# Altium PCB PCB.PcbDoc (part 4 of 11)
Units mm, origin at the board's own origin, x right, y up, seen from the top; angles counter-clockwise.
Board outline 100.46 x 70.51 mm, 10 copper layers (L1(SIG), L2(GND), L3(PWR), L4(SIG), L5(GND), L6(SIG), L7(GND), L8(SIG), L9(GND), L10(SIG)), stack 1.49 mm thick; 425 components, 324 nets, 2004 pads, 1425 vias.
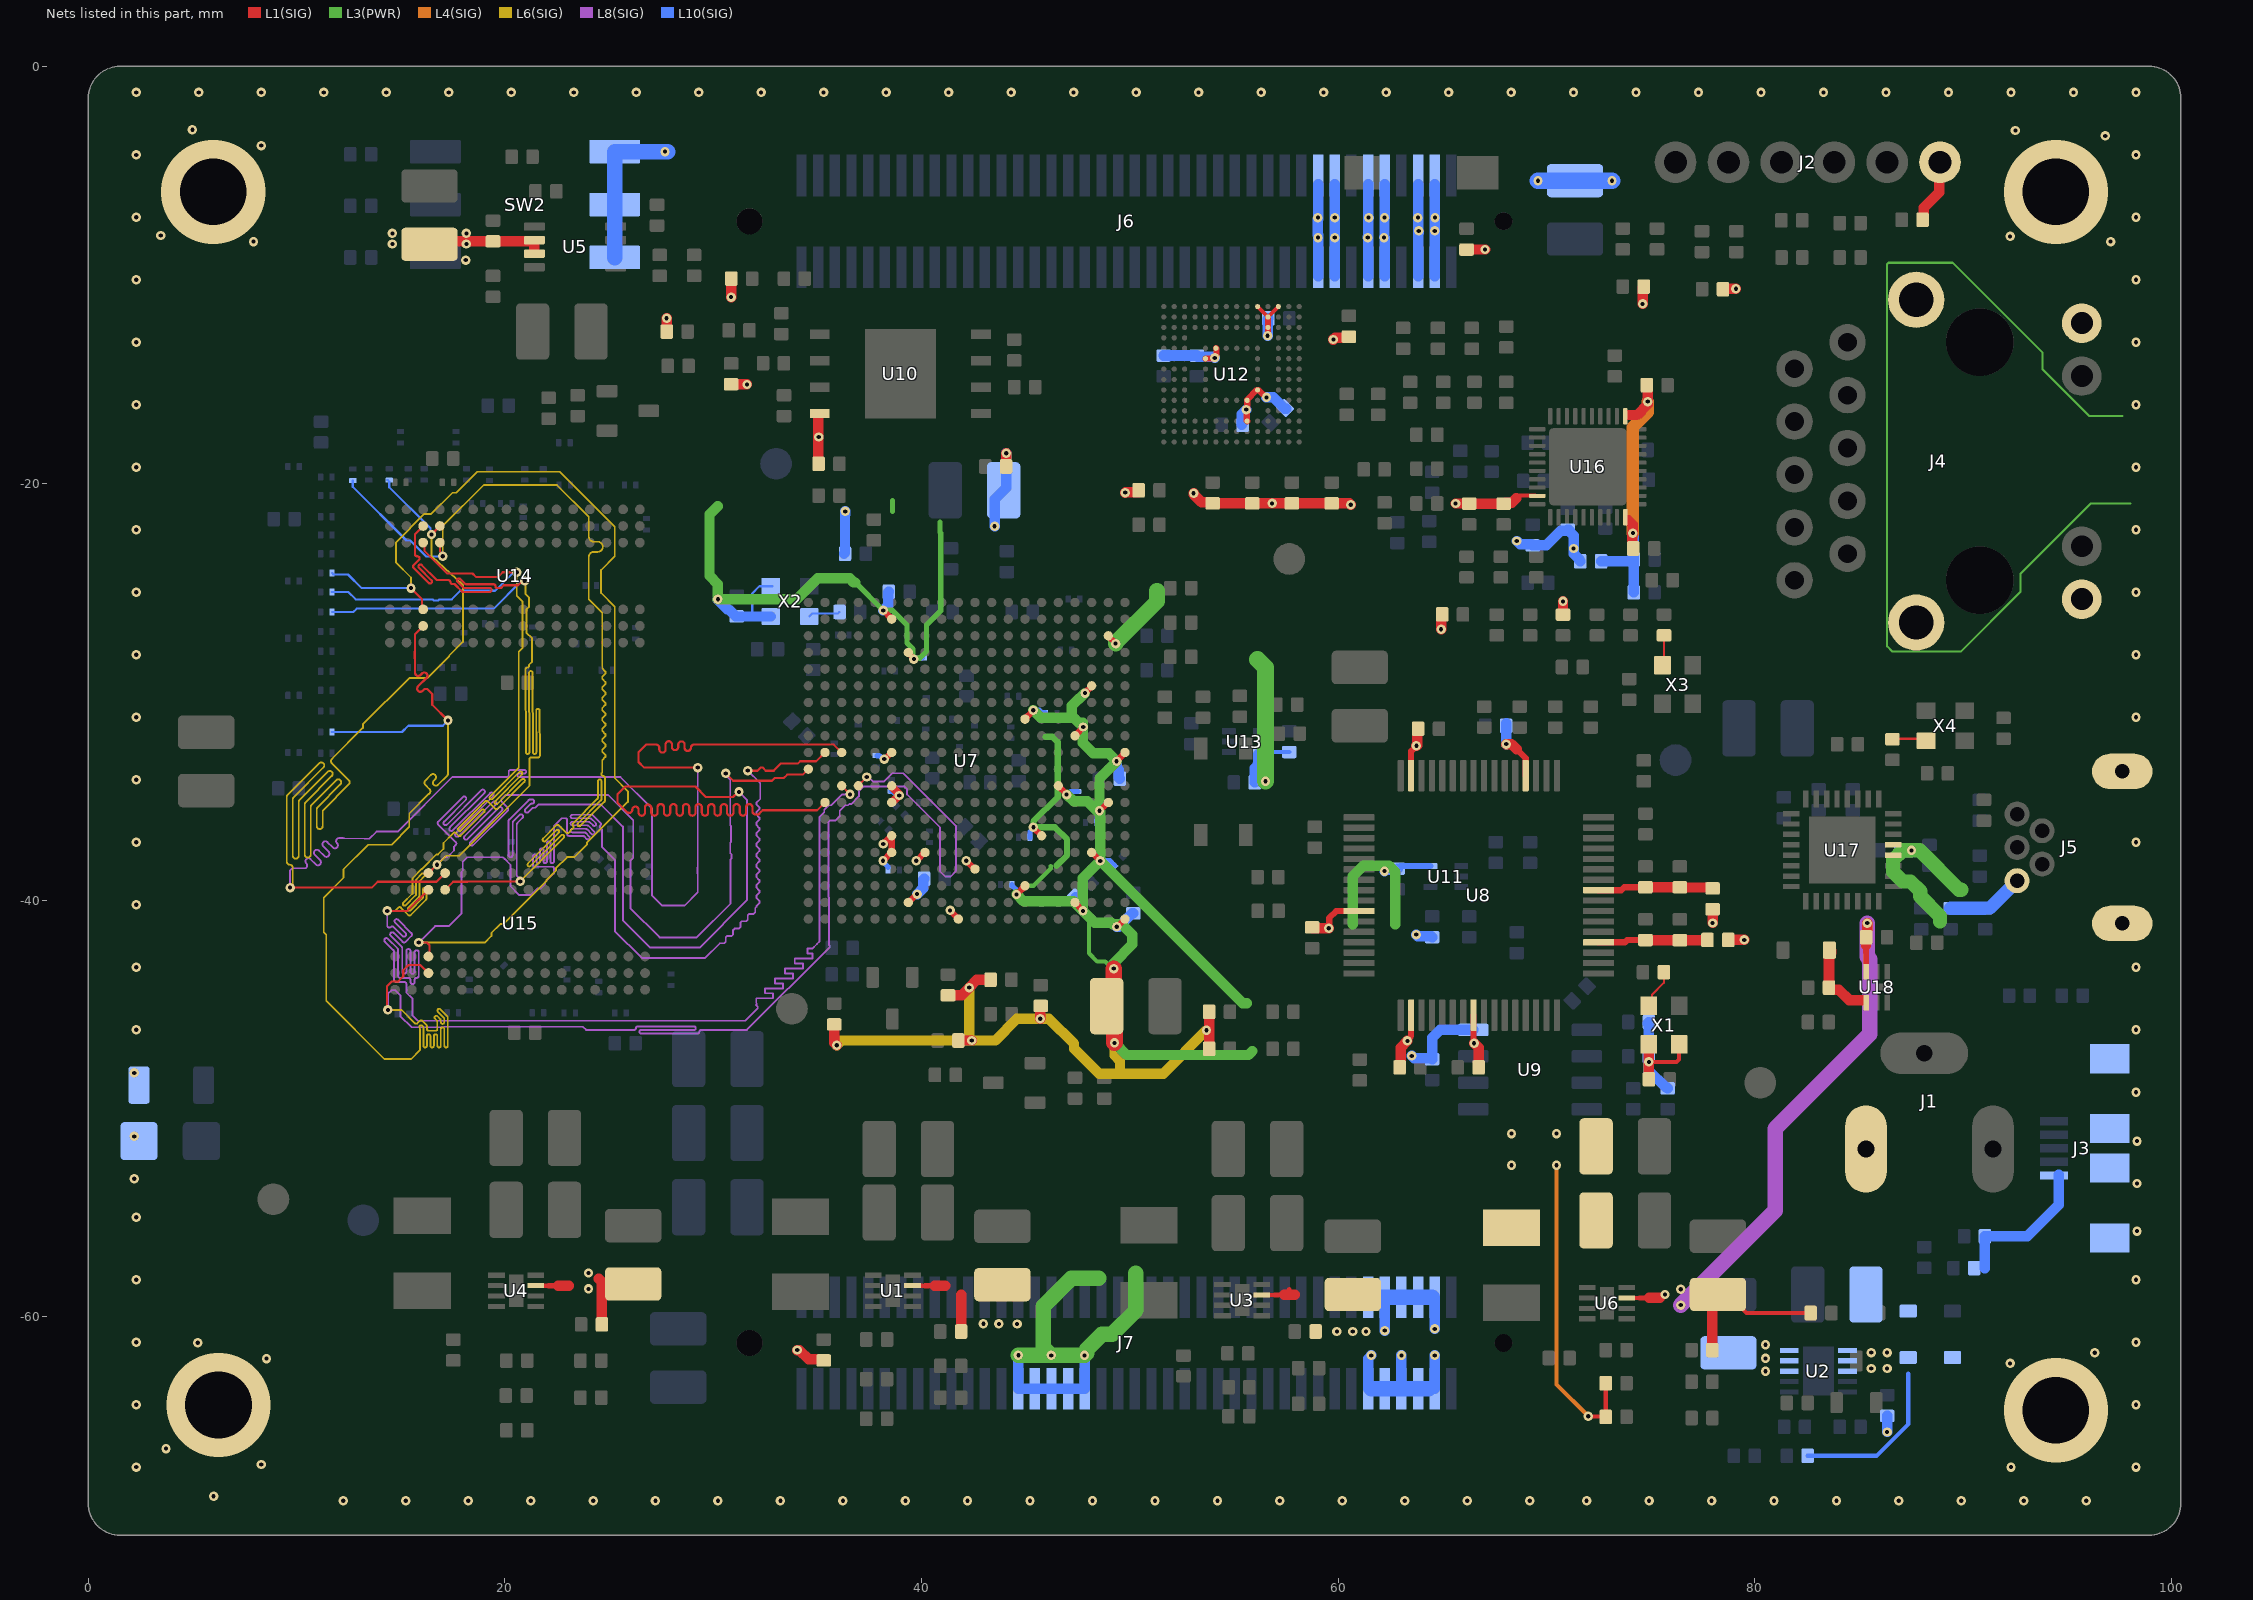
[diagram p11: the nets of this part, all layers, seen from the top]

## Via types
v1: diameter 0.45, hole 0.2, L1(SIG) to L10(SIG), tented both sides, 1194 vias
v2: diameter 0.45, hole 0.2, L1(SIG) to L10(SIG), 211 vias
v3: diameter 0.6, hole 0.25, L1(SIG) to L10(SIG), 9 vias
v4: diameter 0, hole 0.2, L1(SIG) to L10(SIG), tented both sides, 6 vias
v5: diameter 5, hole 3.2, L1(SIG) to L10(SIG), tented both sides, 4 vias
v6: diameter 0.45/0.45/0.45/0.45/0.45/0.45/0.45/0.45/0.45/0.45 (per signal layer), hole 0.2, L1(SIG) to L10(SIG), tented both sides, 1 vias

## Nets (pads, with @x,y where several pads share a name; then routed paths per layer and width w, separated by ;. In a path a pad name is that pad's centre, name@x,y a point inside that pad or via, vN(x,y) a via of type N, cw(c..) or ccw(c..) an arc to the next point about the centre after c; other vN are vias at no path point) (continued)
+3V3: C27.2 C28.2 C29.2 C51.2 C52.2 C53.2 C66.2 C67.2 C68.2 C69.2 C70.2 C71.2 C72.2 C73.2 C74.2 C75.2 C76.2 C77.2 C78.2 C79.2 C80.2 C86.2 C89.2 C90.2 C91.2 C92.2 C95.2 C97.2 C98.2 C99.1 C100.2 C101.1 C105.1 C106.1 C107.1 C108.1 C109.1 C110.2 C171.2 C172.2 C180.2 C181.2 C191.2 FB2.1 FB3.1 FB5.1 J2.6 J4.11 J4.14 J6.3 J6.4 J6.5 J6.6 J6.9 J6.10 J6.11 J6.12 J6.15 J6.16 J6.17 J6.18 J7.46 J7.48 J7.50 J7.52 J7.54 L4.2 R23.2 R30.2 R31.2 R32.2 R33.2 R34.2 R39.1 R50.2 R51.1 R52.1 R54.2 R55.2 R56.1 R57.1 R69.2 R70.2 R77.1 R78.1 R86.1 R87.1 R88.1 R89.1 R90.1 R91.1 R93.2 R97.1 R98.1 R144.1 R145.1 SW2.4 SW2.5 SW2.6 U7.B6 U7.C19 U7.D7 U7.F18 U7.H14 U7.J17 U7.K6 U7.K20 U7.M6 U7.M16 U7.N6 U7.N19 U7.R6 U7.R15 U7.T6 U7.T8 U7.T18 U7.U11 U7.V14 U7.W7 U7.W17 U7.Y10 U7.Y20 U8.20 U8.31 U8.42 U8.50 U8.56 U9.8 U10.8 U11.5 U12.C6 U12.E6 U12.F5 U12.J10 U12.K9 U12.M4 U12.N4 U12.P3 U12.P5 U13.5 U16.29 U17.20 U17.21 X1.1 X1.4 X2.1 X2.4 | length 326.6
  L1(SIG) w0.2: U12.P5@56.134,-11.506 U12.N4@56.634,-12.006 U12.P3@57.134,-11.506 ; 68.557,-20.706 68.557,-20.698 68.674,-20.581 U16.29@69.457,-20.581 ; v1(72.009,-64.774) 72.026,-64.79 72.832,-64.79 C27.2@72.849,-64.807 R23.2@72.849,-63.191 ; v1(74.922,-47.763) 76.254,-47.763 76.371,-47.646 X1.1@76.371,-46.921
  L1(SIG) w0.3: v1@38.163,-38.105 U7.T6@38.559,-37.71 ; v1(38.163,-37.305) U7.R6@38.559,-36.91 ; v1(38.168,-26.089) U7.B6@38.581,-26.502 ; v1(38.217,-33.23) 38.234,-33.23 38.565,-32.898 U7.K6@38.57,-32.898 ; U7.T6@38.57,-37.71 U7.R6@38.57,-36.91 ; U7.W7@39.381,-40.11 39.781,-39.71 v1(39.793,-39.71) ; U7.D7@39.381,-28.11 39.381,-28.147 39.635,-28.401 v1(39.635,-28.428) ; v1(39.752,-38.105) 39.763,-38.105 40.159,-37.71 U7.T8@40.17,-37.71 ; v1@41.375,-40.503 U7.Y10@41.77,-40.898 ; v1(42.147,-38.11) 42.159,-38.11 42.559,-38.51 U7.U11@42.57,-38.51 U7.U11@42.581,-38.51 ; v1(44.564,-39.726) U7.V14@44.97,-39.321 ; U7.H14@44.97,-31.298 45.37,-30.898 v1(45.37,-30.887) ; v1@45.375,-36.514 U7.R15@45.77,-36.91 ; U7.M16@46.57,-34.51 46.57,-34.521 46.97,-34.921 v1(46.97,-34.932) ; U7.W17@47.359,-40.11 47.752,-40.503 v1(47.752,-40.514) ; U7.J17@47.37,-32.11 47.37,-32.098 47.77,-31.698 v1(47.77,-31.687) ; v1(47.85,-30.062) 47.85,-30.046 48.17,-29.726 U7.F18@48.17,-29.721 ; U7.T18@48.182,-37.71 v1(48.587,-38.115) ; v1(48.547,-35.71) 48.559,-35.71 48.959,-35.31 U7.N19@48.97,-35.31 ; U7.C19@48.97,-27.321 48.97,-27.322 49.32,-27.672 v1(49.32,-27.685) ; v1(49.37,-33.332) 49.37,-33.321 49.77,-32.921 U7.K20@49.77,-32.91 ; v1(49.378,-41.279) 49.389,-41.279 U7.Y20@49.758,-40.91 ; U12.J10@53.634,-14.006 53.644,-13.996 54.048,-13.996 v1(54.076,-13.967) 54.076,-13.927 54.159,-13.844 54.159,-13.53 U12.K9@54.134,-13.506 ; v1(55.588,-16.453) 55.617,-16.482 55.617,-16.989 U12.C6@55.634,-17.006 ; v1@55.634,-16.456 U12.E6@55.634,-16.006 55.634,-15.975 56.104,-15.506 U12.F5@56.134,-15.506 56.164,-15.506 56.525,-15.867 v1(56.562,-15.867) ; v1(56.619,-12.905) 56.634,-12.889 U12.M4@56.634,-12.506 U12.N4@56.634,-12.006 ; v1(59.551,-41.353) 59.579,-41.324 59.579,-40.853 59.91,-40.523 U8.42@61.006,-40.523 ; v1(63.327,-46.758) 63.327,-46.704 63.506,-46.525 U8.50@63.506,-45.523 ; U8.31@63.506,-34.023 63.506,-32.856 63.758,-32.604 v1(63.758,-32.591) ; U8.56@66.506,-45.523 66.506,-46.847 v1(66.532,-46.873) ; 68.58,-32.766 69.006,-33.192 U8.20@69.006,-34.023
  L1(SIG) w0.4: U7.N6@38.57,-35.31 38.584,-35.31 38.92,-34.974 v1(38.934,-34.974) 38.906,-34.945 38.906,-34.886 38.57,-34.55 U7.M6@38.57,-34.521
  L1(SIG) w0.5: v1(27.764,-12.069) 27.764,-12.696 R78.1@27.772,-12.704 ; R57.1@30.861,-15.236 30.869,-15.244 v1(31.623,-15.244) ; v1(30.861,-11.053) 30.869,-11.045 R56.1@30.869,-10.164 ; C101.1@35.053,-18.954 U10.8@35.053,-16.666 ; R32.2@35.814,-45.97 35.814,-46.842 v1(35.935,-46.964) ; R34.2@41.275,-44.573 41.287,-44.561 41.93,-44.561 v1(42.291,-44.2) 42.66,-43.83 43.303,-43.83 R39.1@43.315,-43.819 ; R97.1@41.775,-46.74 v1(42.418,-46.74) ; v1(45.706,-45.697) 45.706,-45.095 R98.1@45.72,-45.081 ; R52.1@53.81,-47.139 R51.1@53.81,-45.361 ; C89.2@58.755,-41.305 58.803,-41.353 v1(59.551,-41.353) ; C90.2@62.954,-48.028 63.004,-47.978 63.004,-47.081 v1(63.327,-46.758) ; v1(63.758,-32.591) 63.793,-32.556 63.793,-31.822 C91.2@63.843,-31.772 ; v1(64.947,-26.995) 64.947,-26.334 R144.1@64.997,-26.284 ; v1(65.643,-20.96) 66.288,-20.96 C171.2@66.294,-20.967 C172.2@67.945,-20.967 67.995,-20.967 68.045,-20.917 68.346,-20.917 68.557,-20.706 ; R33.2@66.167,-8.767 v1(67.056,-8.767) ; v1(66.532,-46.873) 66.748,-47.089 C95.2@66.748,-48.028 ; v1(68.072,-32.512) 68.326,-32.512 68.58,-32.766 ; R145.1@70.797,-26.292 70.799,-26.29 v1(70.799,-25.655) ; v1(74.618,-11.376) 74.618,-10.594 R31.2@74.668,-10.545 ; C98.2@74.922,-48.605 v1(74.922,-47.763) X1.4@74.921,-46.921 ; v1(77.978,-41.095) FB2.1@77.978,-40.486 ; R30.2@78.478,-10.672 78.5,-10.65 v1(79.099,-10.65) ; FB3.1@78.732,-41.91 v1(79.502,-41.91) ; C86.2@88.059,-7.338 88.109,-7.288 88.109,-6.764 88.861,-6.012 88.861,-4.615 J2.6@88.9,-4.576
  L1(SIG) w0.508: R69.2@44.061,-19.181 44.069,-19.173 v1(44.069,-18.546) ; v1(49.78,-20.438) 49.798,-20.42 50.381,-20.42 50.427,-20.374 R91.1@50.427,-20.324 ; v1(53.066,-20.463) 53.066,-20.524 53.447,-20.905 53.929,-20.905 R88.1@53.975,-20.951 R87.1@55.88,-20.951 v1(56.832,-20.951) R86.1@57.785,-20.951 60.542,-20.951 v1(60.609,-21.017) ; v1(59.776,-13.085) 59.865,-12.996 60.356,-12.996 60.402,-12.95 R90.1@60.452,-12.95
  L1(SIG) w0.8: C51.2@48.892,-45.089 49.268,-45.465 v1(49.268,-46.851) ; C51.2@48.955,-44.775 49.228,-44.502 v1(49.228,-43.286)
  L3(PWR) w0.2: v1(44.564,-39.726) 44.981,-39.31 45.376,-39.31 46.205,-38.481 46.205,-38.354 ; 48.037,-40.799 48.037,-42.548 48.437,-42.947 48.824,-42.947 49.163,-43.286 v1(49.228,-43.286)
  L3(PWR) w0.254: 36.83,-24.751 v1(38.168,-26.089) 38.613,-26.089 39.309,-26.785 39.309,-27.653 39.598,-27.942 39.598,-28.39 v1(39.635,-28.428) ; 38.608,-21.336 38.608,-20.828 ; v1@39.64,-28.432 39.682,-28.39 39.912,-28.39 40.243,-28.059 40.243,-26.8 40.92,-26.123 40.92,-22.378 40.894,-22.352 40.894,-21.844
  L3(PWR) w0.3: 45.954,-32.153 46.286,-32.153 46.543,-32.41 46.543,-35.055 45.375,-36.222 v1(45.375,-36.503) 46.409,-36.503 46.99,-37.084 46.99,-37.846 46.482,-38.354
  L3(PWR) w0.5: 30.226,-21.082 29.825,-21.483 29.825,-24.426 30.225,-24.826 v1(30.225,-25.556) 34.008,-25.556 35.015,-24.549 36.556,-24.549 36.758,-24.751 36.83,-24.751 ; v1(44.564,-39.726) 44.898,-40.06 46.007,-40.06 46.02,-40.047 47.285,-40.047 v1(47.752,-40.514) ; v1(45.37,-30.887) 45.729,-31.246 47.119,-31.246 47.218,-31.148 ; v1(46.97,-34.932) 47.3,-35.262 47.959,-35.262 48.407,-35.71 v1(48.547,-35.71) ; v1(47.85,-30.062) 47.578,-30.335 47.554,-30.335 47.218,-30.671 47.218,-31.148 ; 55.626,-44.958 55.43,-44.958 v1(48.587,-38.115) ; 55.88,-47.244 55.688,-47.436 49.853,-47.436 v1(49.268,-46.851) 49.268,-43.327 v1(49.228,-43.286) 49.228,-43.022 50.123,-42.127 50.123,-41.65 49.62,-41.148 49.188,-41.148 49.122,-41.082 48.646,-41.082 48.644,-41.085 48.323,-41.085 48.037,-40.799 v1(47.752,-40.514) ; 60.706,-41.148 60.706,-38.862 61.214,-38.354 62.445,-38.354 62.738,-38.647 62.738,-41.148 ; 47.218,-31.148 47.554,-31.485 47.752,-31.485 47.752,-32.454 48.252,-32.954 48.992,-32.954 v1(49.37,-33.332) 48.547,-34.155 v1(48.547,-35.71) ; v1(47.752,-40.514) 47.752,-38.95 v1(48.587,-38.115) ; v1(48.547,-35.71) 48.587,-35.749 v1(48.587,-38.115)
  L3(PWR) w0.686: 88.9,-41.025 88.9,-40.771 87.944,-39.815 87.944,-39.567 87.482,-39.104 87.107,-39.104 86.644,-38.642 86.644,-38.074 87.108,-37.61 v1(87.528,-37.61) 87.92,-37.61 89.811,-39.501 89.916,-39.501
  L3(PWR) w0.75: v1(44.653,-61.849) v1@46.224,-61.849 ; v1(46.227,-61.852) v1@46.224,-61.849 ; 48.514,-58.153 47.198,-58.153 45.847,-59.503 45.847,-61.472 v1@46.224,-61.849 ; v1(49.32,-27.685) 49.32,-27.646 51.308,-25.658 51.308,-25.146 ; 50.292,-57.916 50.292,-59.694 49.149,-60.837 48.667,-60.837 47.941,-61.563 47.941,-61.739 v1(47.827,-61.852) 47.824,-61.849 v1@46.224,-61.849
  L3(PWR) w0.8: 56.134,-28.448 56.515,-28.829 v1(56.515,-34.294)
  L4(SIG) w0.2: v1(70.485,-52.731) 70.485,-63.25 v1(72.009,-64.774)
  L6(SIG) w0.5: v1(35.935,-46.964) 36.159,-46.74 v1(42.418,-46.74) ; v1(42.291,-44.2) 42.291,-46.613 v1(42.418,-46.74) ; v1(49.268,-46.851) 49.268,-47.443 49.53,-47.704 49.53,-48.331 ; v1(53.682,-46.25) 51.601,-48.331 49.53,-48.331 ; v1(42.418,-46.74) 43.54,-46.74 44.583,-45.697 v1(45.706,-45.697) 46.12,-45.697 47.325,-46.902 47.325,-47.126 48.53,-48.331 49.53,-48.331
  L10(SIG) w0.1: 31.877,-26.381 31.877,-25.277 32.221,-24.933 X2.1@32.857,-24.933
  L10(SIG) w0.2: v1@48.454,-35.87 48.547,-35.777 v1@48.547,-35.763 ; U13.5@56.239,-32.889 R93.2@57.658,-32.889
  L10(SIG) w0.254: C66.2@37.875,-33.061 37.934,-33.061 37.952,-33.08 38.014,-33.08 38.164,-33.23 v1(38.217,-33.23) ; v1(38.152,-38.105) 38.152,-38.158 38.391,-38.396 C75.2@38.391,-38.426 ; C77.2@38.555,-34.767 38.601,-34.767 38.77,-34.936 38.897,-34.936 v1(38.934,-34.974) ; v1(39.635,-28.428) 39.688,-28.428 39.738,-28.378 C53.2@40.046,-28.378 ; C71.2@44.344,-39.247 44.344,-39.293 44.527,-39.476 44.527,-39.689 v1(44.564,-39.726) ; C73.2@45.212,-36.998 45.214,-36.996 45.214,-36.717 45.375,-36.556 v1(45.375,-36.503) ; v1(46.97,-34.932) 47.023,-34.932 47.173,-34.783 47.496,-34.783 C74.2@47.498,-34.781 ; C72.2@48.429,-36.274 48.431,-36.272 48.431,-35.879 v1@48.547,-35.763 ; v1(48.587,-38.115) 49.047,-38.115 C70.2@49.255,-38.323
  L10(SIG) w0.3: C100.2@62.865,-38.485 62.984,-38.366 U11.5@64.433,-38.366
  L10(SIG) w0.305: v1(45.37,-30.887) 45.398,-30.915 45.647,-30.915 45.745,-31.013 C76.2@45.927,-31.013
  L10(SIG) w0.5: v1(30.225,-25.556) 30.225,-25.57 30.686,-26.031 30.737,-26.031 31.088,-26.382 X2.4@32.766,-26.382 ; R77.1@36.28,-23.372 36.33,-23.322 36.33,-21.5 36.345,-21.485 v1(36.345,-21.336) ; v1(38.168,-26.089) 38.41,-25.847 38.41,-25.215 C52.2@38.427,-25.198 ; v1(44.653,-61.849) 44.642,-61.86 J7.54@44.642,-63.459 J7.52@45.442,-63.459 J7.50@46.242,-63.459 J7.48@47.042,-63.459 J7.46@47.842,-63.459 47.842,-61.867 v1(47.827,-61.852) ; C68.2@47.398,-39.854 47.398,-39.925 47.752,-40.278 v1(47.752,-40.514) ; v1(49.37,-33.332) 49.37,-33.626 49.472,-33.728 49.472,-34.117 C79.2@49.522,-34.167 ; v1(49.378,-41.279) 49.472,-41.279 50.115,-40.636 C69.2@50.165,-40.636 ; C106.1@53.213,-13.855 53.263,-13.905 54.014,-13.905 v1(54.076,-13.967) ; C109.1@55.372,-17.17 55.372,-16.67 v1(55.588,-16.453) ; C110.2@55.999,-34.35 C110.2@55.999,-34.344 ; U13.5@56.154,-32.989 56.154,-33.512 55.999,-33.667 C110.2@55.999,-34.344 ; v1(56.515,-34.294) 56.049,-34.294 C110.2@55.999,-34.344 ; v1(56.562,-15.867) 56.886,-15.867 57.433,-16.414 C105.1@57.504,-16.414 ; v1(56.619,-12.905) 56.619,-12.108 C108.1@56.658,-12.069 ; J6.18@59.042,-10.04 59.042,-8.068 59.03,-8.055 59.03,-7.308 59.042,-7.295 J6.17@59.042,-5.64 ; J6.16@59.842,-10.04 59.842,-8.086 59.839,-8.083 59.839,-7.28 59.842,-7.277 J6.15@59.842,-5.64 ; J6.12@61.442,-10.04 61.442,-8.19 61.424,-8.172 61.442,-8.153 61.442,-7.269 61.468,-7.243 61.442,-7.217 J6.11@61.442,-5.64 ; v1(62.23,-38.608) 62.303,-38.535 62.815,-38.535 C100.2@62.865,-38.485 ; J6.10@62.242,-10.04 62.242,-8.202 62.205,-8.165 62.23,-8.14 62.23,-7.243 62.242,-7.231 J6.9@62.242,-5.64 ; v1(63.535,-47.475) 63.646,-47.587 64.466,-47.587 C97.2@64.516,-47.637 64.516,-46.613 64.897,-46.232 U9.8@66.49,-46.232 ; v1(63.754,-41.656) 63.827,-41.729 64.466,-41.729 R70.2@64.516,-41.779 ; J6.6@63.842,-10.04 63.842,-7.983 63.872,-7.952 63.842,-7.922 J6.5@63.842,-5.64 ; J6.4@64.642,-10.04 64.642,-7.961 64.64,-7.959 v1(64.64,-7.872) 64.64,-7.34 64.642,-7.338 J6.3@64.642,-5.64 ; C92.2@68.064,-31.496 68.064,-32.504 v1(68.072,-32.512) ; v1(68.58,-22.757) 68.748,-22.925 69.292,-22.925 C180.2@69.342,-22.975 69.35,-22.967 70.001,-22.967 70.698,-22.27 70.969,-22.27 C181.2@71.019,-22.22 71.069,-22.22 71.119,-22.27 71.119,-22.32 71.307,-22.509 v1(71.307,-23.118) 71.307,-23.364 71.578,-23.634 71.578,-23.684 FB5.1@71.628,-23.734 ; R55.2@74.872,-45.901 R55.2@74.922,-45.851 R54.2@74.922,-47.502 ; v1(74.922,-47.763) R54.2@74.922,-47.502 ; R54.2@74.922,-47.763 74.922,-48.187 75.719,-48.984 75.769,-48.984 R50.2@75.819,-49.034
  L10(SIG) w0.508: v1(39.793,-39.71) 40.083,-39.419 40.083,-39.016 C78.2@40.129,-38.97 ; v1(43.514,-22.054) 43.514,-20.755 C80.2@43.945,-20.324 44.069,-20.2 v1(44.069,-18.546) ; C107.1@51.625,-13.855 C106.1@53.213,-13.855
  L10(SIG) w0.686: C191.2@87.005,-37.624 87.019,-37.61 v1(87.528,-37.61)
  L10(SIG) w0.75: SW2.6@25.273,-9.148 SW2.5@25.273,-6.608 SW2.4@25.273,-4.068 27.809,-4.068 v1@27.813,-4.064
  L10(SIG) w0.8: v1(69.596,-5.465) 71.371,-5.465 C67.2@71.374,-5.462 v1(73.149,-5.462)
  other v1: 68.326,-52.731 68.326,-51.207 70.485,-51.207 41.375,-40.492 35.069,-17.764 59.037,-8.193 59.839,-8.193 61.424,-8.193 62.205,-8.193 63.872,-7.872 59.03,-7.232 59.839,-7.232 61.468,-7.232 62.23,-7.232 63.831,-7.232 64.654,-7.232 27.686,-4.064
+3V3_ETH: C176.2 C177.2 C178.2 C179.2 FB5.2 U16.11 U16.40 | length 14.5
  L1(SIG) w0.5: 73.936,-21.77 74.155,-21.988 v1(74.155,-22.38) ; 73.976,-16.711 74.352,-16.711 74.868,-16.195 v1(74.868,-16.068) ; C176.2@74.116,-23.124 v1@74.116,-22.38 ; C177.2@74.818,-15.278 74.868,-15.328 v1(74.868,-16.068)
  L4(SIG) w0.6: v1(74.155,-22.38) 74.155,-17.289 74.868,-16.576 v1(74.868,-16.068)
  L10(SIG) w0.5: FB5.2@72.628,-23.734 74.144,-23.734 C179.2@74.194,-23.684 ; v1(74.155,-22.38) 74.194,-22.419 C179.2@74.194,-23.684 ; C178.2@74.194,-25.225 C179.2@74.194,-23.684
+3V3_FTDI_PHY: C87.2 C88.2 FB3.2 U8.4 | length 5.3
  L1(SIG) w0.3: U8.4@72.506,-42.023 73.778,-42.023 73.885,-41.916 C87.2@74.757,-41.916
  L1(SIG) w0.5: C87.2@74.757,-41.916 74.761,-41.92 76.404,-41.92 C88.2@76.408,-41.924 FB3.2@77.732,-41.924
+3V3_FTDI_PLL: C81.2 C82.2 FB2.2 U8.9 | length 5.6
  L1(SIG) w0.3: U8.9@72.506,-39.523 73.599,-39.523 73.738,-39.384 C82.2@74.757,-39.384
  L1(SIG) w0.5: C82.2@74.757,-39.384 C81.2@76.408,-39.384 ; C81.2@76.416,-39.392 FB2.2@78.06,-39.392
+5V: C1.2 C7.2 C10.2 C15.2 C17.2 C21.2 C26.2 C198.2 R1.2 R3.1 R7.2 R9.2 R14.2 R22.2 R24.2 U1.3 U2.8 U2.9 U2.10 U3.3 U4.3 U5.6 U5.7 U6.3 U18.6 | length 51.3
  L1(SIG) w0.2: U4.3@21.494,-58.51 22.103,-58.51 ; U1.3@39.576,-58.51 40.186,-58.51 ; U3.3@56.35,-58.955 56.96,-58.955 ; 57.59,-58.745 57.658,-58.678 ; U6.3@73.863,-59.103 74.473,-59.103 ; C26.2@78.232,-58.935 78.728,-58.935 79.614,-59.821 R22.2@82.685,-59.821
  L1(SIG) w0.254: 22.103,-58.51 22.553,-58.51 ; 40.186,-58.51 40.636,-58.51 ; 56.96,-58.955 57.41,-58.955 ; 74.473,-59.103 74.923,-59.103 ; U18.6@85.36,-43.438 85.36,-42.529
  L1(SIG) w0.3: 85.344,-42.513 85.344,-42.168
  L1(SIG) w0.5: C21.2@16.383,-8.516 16.521,-8.378 U5.6@21.155,-8.378 ; U5.7@21.418,-8.881 U5.6@21.418,-8.411 ; 22.559,-58.504 23.067,-58.504 ; 24.511,-58.17 24.661,-58.319 R14.2@24.661,-60.369 ; v1(34.036,-61.599) 34.144,-61.599 34.594,-62.049 35.256,-62.049 R3.1@35.306,-62.099 ; 40.642,-58.504 41.15,-58.504 ; 41.91,-58.932 41.91,-60.702 R1.2@41.902,-60.71 R1.2@41.918,-60.694 ; C1.2@43.196,-59.01 C1.2@43.508,-58.697 ; C1.2@43.883,-58.46 43.898,-58.46 C1.2@44.448,-59.01 ; 57.416,-58.949 57.924,-58.949 ; 74.929,-59.097 75.437,-59.097 ; R24.2@77.97,-61.599 77.97,-59.197 C26.2@78.232,-58.935 ; C198.2@85.343,-41.796 85.402,-41.737 v1(85.402,-41.102) ; 85.344,-42.168 C198.2@85.344,-41.795
  L8(SIG) w0.75: v1(76.454,-59.44) 80.981,-54.913 80.981,-50.976 85.527,-46.43 85.527,-42.841 85.402,-42.716 v1(85.402,-41.102)
  L10(SIG) w0.5: v1(86.36,-65.532) R7.2@86.36,-64.762
  other v1: 80.518,-62.615 80.522,-62 80.518,-61.345 59.941,-60.705 60.706,-60.71 61.341,-60.71 42.972,-60.332 43.718,-60.343 44.593,-60.349 75.692,-58.932 24.019,-58.662 76.454,-58.678 24.019,-57.9 18.12,-9.277 14.599,-8.499 18.155,-8.499 14.599,-7.991 18.155,-7.991
+5V_USB: C93.2 FB4.1 J3.1 | length 7.2
  L10(SIG) w0.5: 91.043,-57.662 91.043,-56.138 C93.2@91.051,-56.138 93.091,-56.138 94.607,-54.622 J3.1@94.607,-53.181
+5V_USB_AB: C196.2 FB7.2 J5.1 | length 3.7
  L10(SIG) w0.635: FB7.2@89.408,-40.39 89.412,-40.394 91.055,-40.394 C196.2@91.059,-40.398 91.077,-40.38 91.287,-40.38 J5.1@92.598,-39.069
+5V_USB_SW: C199.2 D15.A U18.1 | length 4.4
  L1(SIG) w0.254: 84.665,-44.918 U18.1@85.36,-44.918
  L1(SIG) w0.508: C199.2@83.566,-44.25 83.612,-44.296 84.043,-44.296 84.544,-44.797 85.231,-44.797 ; C199.2@83.566,-44.2 83.566,-42.621 83.665,-42.522 D15.A@83.665,-42.422
+VCC: D1.K D7.K J7.3 J7.4 J7.5 J7.6 J7.7 J7.8 J7.9 J7.10 J7.11 J7.12 R5.2 U2.1 U2.2 U2.3 | length 21.4
  L10(SIG) w0.2: R5.2@82.542,-66.675 85.853,-66.675 87.376,-65.152 87.376,-62.738
  L10(SIG) w0.5: J7.12@61.442,-63.459 61.442,-62.004 v1(61.594,-61.853) ; v1(62.241,-60.665) J7.9@62.242,-59.059 ; J7.8@63.042,-63.459 v1@63.042,-61.854 ; J7.4@64.642,-63.459 v1(64.643,-61.853) v1(64.643,-61.853) ; J7.3@64.642,-59.059 64.642,-60.582 v1(64.643,-60.583)
  L10(SIG) w0.75: J7.12@61.593,-63.459 J7.10@62.242,-63.459 J7.8@63.042,-63.459 J7.6@63.842,-63.459 64.344,-63.459 ; 61.722,-59.059 J7.9@62.242,-59.059 J7.7@63.042,-59.059 J7.5@63.842,-59.059 J7.3@64.513,-59.059
  other v1: 85.598,-62.484 86.36,-62.484 63.043,-61.853 85.598,-61.722 86.36,-61.722
+VDC: C6.2 D1.A J1.1
CGND: C31.1 J3.SH J4.SH J5.SH R28.1 | length 48.4
  L3(PWR) w0.1: 97.663,-16.768 96.075,-16.768 93.808,-14.5 93.808,-13.704 89.505,-9.402 86.419,-9.402 86.36,-9.46 86.36,-27.817 86.614,-28.071 89.886,-28.071 92.759,-25.198 92.759,-24.339 96.139,-20.959 98.044,-20.959
  other v2: 12.24,-68.834 15.24,-68.834 18.24,-68.834 21.24,-68.834 24.24,-68.834 27.226,-68.834 30.226,-68.834 33.226,-68.834 36.226,-68.834 39.226,-68.834 42.212,-68.834 45.212,-68.834 48.212,-68.834 51.212,-68.834 54.212,-68.834 57.198,-68.834 60.198,-68.834 63.198,-68.834 66.198,-68.834 69.198,-68.834 71.93,-68.834 74.93,-68.834 77.93,-68.834 80.93,-68.834 83.93,-68.834 86.916,-68.834 89.916,-68.834 92.916,-68.834 95.916,-68.834 6.018,-68.615 2.305,-67.22 92.305,-67.22 98.305,-67.22 8.304,-67.091 3.732,-66.329 2.305,-64.22 98.305,-64.22 92.261,-62.237 8.558,-62.011 96.325,-61.729 5.256,-61.249 2.305,-61.22 98.305,-61.22 2.305,-58.22 98.305,-58.22 98.357,-55.887 2.305,-55.22 98.357,-53.601 2.208,-53.375 98.357,-51.569 2.208,-51.343 98.305,-49.22 2.208,-48.295 2.305,-46.22 98.305,-46.22 2.305,-43.22 98.305,-43.22 2.305,-40.22 2.305,-37.22 98.305,-37.22 2.305,-34.22 2.305,-31.22 98.305,-31.22 2.305,-28.22 98.305,-28.22 2.305,-25.22 98.305,-25.22 2.305,-22.22 98.305,-22.22 2.305,-19.22 98.305,-19.22 2.305,-16.22 98.305,-16.22 2.305,-13.22 98.305,-13.22 2.305,-10.22 98.305,-10.22 7.933,-8.389 97.087,-8.389 92.261,-8.135 3.478,-8.094 2.305,-7.22 98.305,-7.22 2.305,-4.22 98.305,-4.22 8.304,-3.776 96.833,-3.309 92.515,-3.055 5.002,-3.014 2.305,-1.22 5.305,-1.22 8.305,-1.22 11.305,-1.22 14.305,-1.22 17.305,-1.22 20.305,-1.22 23.305,-1.22 26.305,-1.22 29.305,-1.22 32.305,-1.22 35.305,-1.22 38.305,-1.22 41.305,-1.22 44.305,-1.22 47.305,-1.22 50.305,-1.22 53.305,-1.22 56.305,-1.22 59.305,-1.22 62.305,-1.22 65.305,-1.22 68.305,-1.22 71.305,-1.22 74.305,-1.22 77.305,-1.22 80.305,-1.22 83.305,-1.22 86.305,-1.22 89.305,-1.22 92.305,-1.22 95.305,-1.22 98.305,-1.22
  other v5: 94.457,-64.485 6.254,-64.235 6,-6 94.457,-6
CLK_12MHZ: R62.1 X1.3 | length 2.9
  L1(SIG) w0.1: X1.3@74.921,-45.071 75.08,-44.911 75.08,-44.529 75.638,-43.972 R62.1@75.638,-43.718 ; R62.1@75.638,-43.718 R62.1@75.832,-43.523 ; R62.1@75.638,-43.718 R62.1@75.638,-43.456 75.638,-43.329 R62.1@75.832,-43.523 ; R62.1@75.832,-43.523 75.892,-43.583 75.892,-43.464 R62.1@75.832,-43.523
CLK_13MHz: R156.2 X4.3 | length 1.7
  L1(SIG) w0.1: R156.2@86.614,-32.254 88.131,-32.254 X4.3@88.229,-32.352
CLK_25MHz: R146.2 X3.3 | length 1.5
  L1(SIG) w0.1: X3.3@75.574,-28.726 75.646,-28.654 R146.2@75.646,-27.292
CLK_33M334: R71.2 X2.3 | length 1.5
  L10(SIG) w0.1: X2.3@34.616,-26.383 34.767,-26.232 36.002,-26.232 R71.2@36.068,-26.166
DDR_A0: R110.1 U7.N2 U14.N3 U15.N3 | length 112.6
  L1(SIG) w0.103: U14.N3@16.879,-22.839 16.879,-23.256 17.023,-23.4 v1(17.023,-23.493) ; U15.N3@17.133,-39.501 17.52,-39.114 18.206,-39.114 18.22,-39.101 v1(20.739,-39.101) ; v1(31.242,-34.802) 31.204,-34.802 30.954,-35.051 29.652,-35.051 29.149,-34.548 25.781,-34.548 25.4,-34.929 25.4,-35.31 25.638,-35.548 25.86,-35.769 ccw(c25.967,-35.662) 26.119,-35.662 cw(c26.27,-35.662) 26.27,-35.51 cw(c26.27,-35.662) 26.422,-35.662 26.422,-35.793 ccw(c26.574,-35.793) 26.574,-35.945 ccw(c26.574,-35.793) 26.725,-35.793 26.725,-35.563 cw(c26.877,-35.563) 26.877,-35.411 cw(c26.877,-35.563) 27.029,-35.563 27.029,-35.793 ccw(c27.181,-35.793) 27.181,-35.945 ccw(c27.181,-35.793) 27.332,-35.793 27.332,-35.541 cw(c27.484,-35.541) 27.484,-35.389 cw(c27.484,-35.541) 27.636,-35.541 27.636,-35.793 ccw(c27.787,-35.793) 27.787,-35.945 ccw(c27.787,-35.793) 27.939,-35.793 27.939,-35.541 cw(c28.091,-35.541) 28.091,-35.389 cw(c28.091,-35.541) 28.242,-35.541 28.242,-35.793 ccw(c28.394,-35.793) 28.394,-35.945 ccw(c28.394,-35.793) 28.546,-35.793 28.546,-35.541 cw(c28.698,-35.541) 28.698,-35.389 cw(c28.698,-35.541) 28.849,-35.541 28.849,-35.793 ccw(c29.001,-35.793) 29.001,-35.945 ccw(c29.001,-35.793) 29.153,-35.793 29.153,-35.541 cw(c29.304,-35.541) 29.304,-35.389 cw(c29.304,-35.541) 29.456,-35.541 29.456,-35.793 ccw(c29.608,-35.793) 29.608,-35.945 ccw(c29.608,-35.793) 29.76,-35.793 29.76,-35.541 cw(c29.911,-35.541) 29.911,-35.389 cw(c29.911,-35.541) 30.063,-35.541 30.063,-35.793 ccw(c30.215,-35.793) 30.215,-35.945 ccw(c30.215,-35.793) 30.366,-35.793 30.366,-35.541 cw(c30.518,-35.541) 30.518,-35.389 cw(c30.518,-35.541) 30.67,-35.541 30.67,-35.793 ccw(c30.821,-35.793) 30.821,-35.945 ccw(c30.821,-35.793) 30.973,-35.793 30.973,-35.541 cw(c31.125,-35.541) 31.125,-35.389 cw(c31.125,-35.541) 31.277,-35.541 31.277,-35.793 ccw(c31.428,-35.793) 31.428,-35.945 ccw(c31.428,-35.793) 31.58,-35.793 31.58,-35.541 cw(c31.732,-35.541) 31.732,-35.389 cw(c31.732,-35.541) 31.883,-35.541 31.883,-35.733 ccw(c32.035,-35.733) 32.035,-35.884 32.177,-35.884 32.314,-35.747 32.376,-35.686 34.993,-35.686 U7.N2@35.37,-35.31
  L6(SIG) w0.088: v1(17.023,-23.493) 17.018,-22.11 17.018,-22.038 17.044,-22.012 18.986,-20.07 22.499,-20.07 24.03,-21.6 24.03,-22.505 24.03,-22.549 ccw(c24.273,-22.549) 24.273,-22.793 24.461,-22.793 cw(c24.461,-23.036) 24.704,-23.036 cw(c24.461,-23.036) 24.461,-23.28 24.273,-23.28 ccw(c24.273,-23.524) 24.03,-23.524 24.03,-24.719 24.03,-25.557 24.678,-26.205 24.678,-28.833 24.678,-28.876 24.828,-29.026 24.828,-29.126 24.678,-29.276 24.678,-29.376 24.828,-29.526 24.828,-29.626 24.678,-29.776 24.678,-29.876 24.828,-30.026 24.828,-30.126 24.678,-30.276 24.678,-30.376 24.828,-30.526 24.828,-30.626 24.678,-30.776 24.678,-30.876 24.828,-31.026 24.828,-31.126 24.678,-31.276 24.678,-31.376 24.828,-31.526 24.828,-31.626 24.678,-31.776 24.678,-31.876 24.828,-32.026 24.828,-32.126 24.678,-32.276 24.678,-32.376 24.828,-32.526 24.828,-32.626 24.678,-32.776 24.678,-32.876 24.828,-33.026 24.828,-33.126 24.678,-33.276 24.678,-33.532 24.678,-33.873 24.638,-33.913 24.638,-33.956 ccw(c24.722,-33.956) 24.722,-34.04 cw(c24.722,-34.124) 24.806,-34.124 24.806,-35.222 cw(c24.722,-35.222) 24.781,-35.281 23.63,-36.433 cw(c23.571,-36.373) 23.511,-36.433 cw(c23.571,-36.373) 23.511,-36.314 24.614,-35.212 ccw(c24.554,-35.153) 24.638,-35.153 24.638,-34.292 ccw(c24.554,-34.292) 24.554,-34.208 ccw(c24.554,-34.292) 24.47,-34.292 24.47,-35.083 cw(c24.387,-35.083) 24.446,-35.142 23.274,-36.314 ccw(c23.334,-36.373) 23.275,-36.433 cw(c23.215,-36.492) 23.274,-36.551 23.243,-36.582 23.091,-36.734 23.06,-36.765 cw(c23.001,-36.706) 22.942,-36.766 22.587,-36.41 ccw(c22.527,-36.469) 22.468,-36.409 21.838,-37.039 ccw(c21.897,-37.099) 21.838,-37.158 ccw(c21.897,-37.099) 21.957,-37.158 22.468,-36.646 cw(c22.527,-36.706) 22.565,-36.631 cw(c22.527,-36.706) 22.587,-36.765 21.112,-38.239 ccw(c21.172,-38.298) 21.112,-38.358 ccw(c21.172,-38.298) 21.231,-38.358 22.705,-36.884 cw(c22.764,-36.943) 22.823,-36.884 cw(c22.764,-36.943) 22.823,-37.002 20.925,-38.901 20.894,-38.932 20.739,-39.086 v1(20.739,-39.101)
  L8(SIG) w0.088: v1(20.739,-39.101) 20.739,-39.003 20.574,-38.838 20.574,-38.612 20.574,-36.366 cw(c20.673,-36.366) 20.603,-36.296 20.848,-36.051 ccw(c20.778,-35.981) 20.848,-35.911 ccw(c20.778,-35.981) 20.707,-35.911 20.405,-36.214 ccw(c20.475,-36.283) 20.376,-36.283 20.376,-37.843 cw(c20.277,-37.843) 20.277,-37.942 cw(c20.277,-37.843) 20.177,-37.843 20.177,-36.201 cw(c20.277,-36.201) 20.206,-36.131 21.142,-35.196 cw(c21.212,-35.266) 21.212,-35.167 21.31,-35.167 cw(c21.31,-35.266) 21.41,-35.266 cw(c21.31,-35.266) 21.31,-35.365 21.294,-35.365 ccw(c21.294,-35.464) 21.224,-35.394 20.987,-35.631 ccw(c21.058,-35.7) 21.128,-35.771 21.306,-35.593 cw(c21.376,-35.663) 21.376,-35.564 21.454,-35.564 21.602,-35.415 24.617,-35.415 25.668,-36.466 25.668,-40.966 26.977,-42.275 29.357,-42.275 31.623,-40.009 31.623,-35.183 v1(31.242,-34.802)
  L10(SIG) w0.103: R110.1@12.7,-19.858 12.7,-20.156 15.28,-22.737 15.455,-22.737 16.217,-23.499 17.018,-23.499 v1(17.023,-23.493)
DDR_A1: R111.1 U7.K2 U14.P7 U15.P7 | length 106.6
  L1(SIG) w0.103: v1(15.494,-25.023) 16.026,-25.555 16.026,-25.986 U14.P7@16.079,-26.039 ; v1(15.863,-42.036) 16.252,-42.036 16.383,-42.168 16.383,-42.651 U15.P7@16.333,-42.701 ; v1(31.659,-33.78) 31.665,-33.786 32.076,-33.786 32.128,-33.786 32.278,-33.636 32.378,-33.636 32.528,-33.786 32.917,-33.786 32.917,-33.765 33.235,-33.448 34.069,-33.448 34.181,-33.335 34.412,-33.335 34.414,-33.333 34.726,-33.333 34.728,-33.335 34.944,-33.335 U7.K2@35.37,-32.91
  L6(SIG) w0.088: v1(15.494,-25.023) 15.494,-24.513 14.777,-23.795 14.777,-22.819 16.135,-21.461 16.467,-21.461 17.487,-20.44 17.663,-20.44 18.669,-19.435 22.641,-19.435 25.273,-22.066 25.273,-23.499 24.615,-24.157 24.615,-25.253 25.273,-25.912 25.273,-34.135 25.908,-34.77 25.908,-35.281 23.937,-37.252 23.937,-37.333 23.338,-37.932 22.988,-37.932 22.454,-38.466 22.454,-38.579 22.004,-39.029 22.004,-39.069 19.94,-41.133 ; v1(15.863,-42.036) 19.036,-42.036 19.358,-41.715 19.358,-41.57 19.78,-41.148 19.955,-41.148 20.006,-41.097 20.006,-41.052
  L8(SIG) w0.088: v1(15.863,-42.036) 16.65,-41.249 17.302,-41.249 17.927,-40.624 17.927,-40.18 17.919,-40.172 17.919,-38.645 17.979,-38.585 17.979,-38.155 18.196,-37.939 19.908,-37.939 19.99,-38.021 20.27,-38.301 20.27,-39.324 20.701,-39.755 21.244,-39.755 21.555,-39.443 21.703,-39.443 21.919,-39.227 21.919,-39.154 22.357,-38.716 22.357,-38.523 22.357,-38.478 ccw(c22.273,-38.478) 22.273,-38.394 21.432,-38.394 cw(c21.432,-38.31) 21.348,-38.31 21.348,-37.898 cw(c21.432,-37.898) 21.432,-37.814 cw(c21.432,-37.898) 21.516,-37.898 21.516,-38.142 ccw(c21.6,-38.142) 21.6,-38.226 ccw(c21.6,-38.142) 21.684,-38.142 21.684,-37.598 cw(c21.768,-37.598) 21.768,-37.514 cw(c21.768,-37.598) 21.852,-37.598 21.852,-38.142 ccw(c21.937,-38.142) 21.937,-38.226 ccw(c21.937,-38.142) 22.021,-38.142 22.021,-37.256 cw(c22.105,-37.256) 22.105,-37.171 cw(c22.105,-37.256) 22.189,-37.256 22.189,-38.142 ccw(c22.273,-38.142) 22.273,-38.226 ccw(c22.273,-38.142) 22.357,-38.142 22.357,-37.127 22.357,-36.447 22.733,-36.072 22.863,-36.072 22.907,-36.072 cw(c22.907,-36.156) 22.991,-36.156 22.991,-36.829 ccw(c23.075,-36.829) 23.075,-36.913 23.747,-36.913 cw(c23.747,-36.997) 23.806,-36.937 23.936,-37.067 ccw(c23.995,-37.008) 24.055,-37.067 ccw(c23.995,-37.008) 24.055,-36.948 23.875,-36.769 ccw(c23.816,-36.829) 23.816,-36.745 23.243,-36.745 cw(c23.243,-36.661) 23.159,-36.661 cw(c23.243,-36.661) 23.243,-36.576 23.886,-36.576 cw(c23.886,-36.661) 23.945,-36.601 24.174,-36.83 ccw(c24.233,-36.77) 24.293,-36.829 ccw(c24.233,-36.77) 24.293,-36.711 24.015,-36.432 ccw(c23.956,-36.492) 23.956,-36.408 23.243,-36.408 cw(c23.243,-36.324) 23.159,-36.324 cw(c23.243,-36.324) 23.243,-36.24 24.025,-36.24 cw(c24.025,-36.324) 24.085,-36.264 24.234,-36.413 ccw(c24.293,-36.353) 24.353,-36.413 ccw(c24.293,-36.353) 24.353,-36.294 24.154,-36.096 ccw(c24.095,-36.156) 24.095,-36.072 23.243,-36.072 cw(c23.243,-35.987) 23.159,-35.987 cw(c23.243,-35.987) 23.243,-35.903 24.165,-35.903 cw(c24.165,-35.987) 24.224,-35.928 24.59,-36.294 cw(c24.531,-36.353) 24.59,-36.413 ccw(c24.65,-36.472) 24.59,-36.531 ; 24.59,-36.532 24.621,-36.563 24.658,-36.6 24.658,-37.439 25.283,-38.063 25.283,-41.484 26.572,-42.773 29.62,-42.773 30.289,-42.104 30.321,-42.073 30.533,-42.073 30.604,-42.002 30.604,-41.79 30.674,-41.719 30.886,-41.719 30.957,-41.649 30.957,-41.437 31.028,-41.366 31.24,-41.366 31.311,-41.295 31.311,-41.083 31.381,-41.012 31.594,-41.012 31.664,-40.942 31.664,-40.729 31.735,-40.659 31.947,-40.659 32.018,-40.588 32.018,-40.376 32.083,-40.31 32.073,-40.3 32.073,-40.29 32.223,-40.14 32.223,-40.04 32.073,-39.89 32.073,-39.79 32.223,-39.64 32.223,-39.54 32.073,-39.39 32.073,-39.29 32.223,-39.14 32.223,-39.04 32.073,-38.889 32.073,-38.789 32.223,-38.639 32.223,-38.539 32.073,-38.389 32.073,-38.289 32.223,-38.139 32.223,-38.039 32.073,-37.889 32.073,-37.789 32.223,-37.639 32.223,-37.539 32.073,-37.389 32.073,-37.289 32.223,-37.139 32.223,-37.039 32.073,-36.889 32.073,-36.789 32.223,-36.639 32.223,-36.539 32.073,-36.389 32.073,-36.289 32.223,-36.139 32.223,-36.039 32.073,-35.889 32.073,-35.789 32.223,-35.639 32.223,-35.539 32.073,-35.389 32.073,-35.329 32.258,-35.143 32.258,-35.116 32.258,-34.928 ccw(c31.889,-34.927) 32.258,-34.927 32.258,-34.379 32.232,-34.353 v1(31.659,-33.78)
  L10(SIG) w0.103: R111.1@11.708,-24.297 11.775,-24.364 12.474,-24.364 13.133,-25.023 v1(15.494,-25.023)
DDR_A2: R112.1 U7.M3 U14.P3 U15.P3 | length 113
  L1(SIG) w0.103: v1(14.351,-40.517) 15.317,-40.517 U15.P3@16.333,-39.501 ; U14.P3@16.079,-22.839 16.135,-22.895 16.135,-23.223 17.228,-24.316 18.444,-24.316 18.609,-24.481 19.356,-24.481 19.36,-24.484 19.672,-24.484 19.895,-24.261 v1(20.574,-24.261) ; U7.M3@36.17,-34.51 v1@36.57,-34.91
  L6(SIG) w0.088: v1(14.351,-40.517) 14.732,-40.517 14.859,-40.39 14.89,-40.359 cw(c14.949,-40.418) 15.008,-40.359 15.364,-40.714 ccw(c15.423,-40.655) 15.482,-40.714 16.213,-39.983 ccw(c16.154,-39.924) 16.238,-39.924 16.238,-39.495 ccw(c16.154,-39.495) 16.154,-39.411 ccw(c16.154,-39.495) 16.07,-39.495 16.07,-39.855 cw(c15.986,-39.855) 16.046,-39.914 15.482,-40.477 cw(c15.423,-40.418) 15.364,-40.477 cw(c15.423,-40.418) 15.364,-40.359 15.878,-39.844 ccw(c15.819,-39.785) 15.902,-39.785 15.902,-39.126 cw(c15.986,-39.126) 15.927,-39.067 16.139,-38.855 ccw(c16.08,-38.796) 16.139,-38.737 ccw(c16.08,-38.796) 16.02,-38.737 15.759,-38.998 ccw(c15.819,-39.057) 15.735,-39.057 15.735,-39.716 cw(c15.651,-39.716) 15.711,-39.775 15.245,-40.24 cw(c15.186,-40.181) 15.127,-40.24 cw(c15.186,-40.181) 15.127,-40.122 15.543,-39.706 ccw(c15.483,-39.647) 15.567,-39.647 15.567,-38.988 cw(c15.651,-38.988) 15.592,-38.929 16.02,-38.5 16.051,-38.469 16.71,-37.81 16.785,-37.81 17.054,-37.541 17.054,-37.256 17.501,-36.809 17.532,-36.778 cw(c17.591,-36.837) 17.65,-36.778 17.769,-36.896 ccw(c17.828,-36.837) 17.887,-36.896 19,-35.783 ccw(c18.941,-35.724) 19,-35.665 ccw(c18.941,-35.724) 18.882,-35.665 17.887,-36.659 cw(c17.828,-36.6) 17.769,-36.659 cw(c17.828,-36.6) 17.769,-36.541 18.822,-35.487 18.853,-35.456 19.025,-35.285 19.056,-35.254 cw(c19.115,-35.313) 19.174,-35.254 19.53,-35.609 ccw(c19.589,-35.55) 19.648,-35.609 20.936,-34.322 ccw(c20.877,-34.262) 20.936,-34.203 ccw(c20.877,-34.262) 20.817,-34.203 19.648,-35.372 cw(c19.589,-35.313) 19.514,-35.35 cw(c19.589,-35.313) 19.53,-35.254 20.816,-33.968 ccw(c20.756,-33.909) 20.816,-33.849 ccw(c20.756,-33.909) 20.697,-33.849 19.411,-35.135 cw(c19.352,-35.076) 19.293,-35.135 cw(c19.352,-35.076) 19.293,-35.017 20.638,-33.672 20.669,-33.641 20.669,-28.081 20.844,-27.907 20.844,-25.658 20.574,-25.388 v1(20.574,-24.261)
  L8(SIG) w0.088: v1(14.351,-40.517) 14.351,-41.261 14.382,-41.292 ; 14.383,-41.293 ccw(c14.452,-41.222) 14.522,-41.293 cw(c14.592,-41.362) 14.662,-41.292 15.093,-41.723 ccw(c15.163,-41.652) 15.233,-41.583 14.733,-41.082 cw(c14.803,-41.012) 14.873,-40.942 15.514,-41.583 cw(c15.443,-41.652) 15.514,-41.722 15.233,-42.003 cw(c15.163,-41.933) 15.093,-42.003 14.662,-41.572 ccw(c14.592,-41.643) 14.522,-41.713 15.044,-42.234 cw(c14.973,-42.304) 15.072,-42.304 15.072,-43.434 ccw(c15.172,-43.434) 15.172,-43.533 ccw(c15.172,-43.434) 15.271,-43.434 15.271,-42.442 cw(c15.37,-42.442) 15.37,-42.343 cw(c15.37,-42.442) 15.469,-42.442 15.469,-43.434 ccw(c15.568,-43.434) 15.667,-43.434 15.667,-42.505 cw(c15.766,-42.505) 15.866,-42.505 15.866,-43.632 cw(c15.766,-43.632) 15.766,-43.731 ccw(c15.766,-43.83) 15.667,-43.83 15.667,-43.929 cw(c15.568,-43.929) 15.469,-43.929 15.469,-43.83 ccw(c15.37,-43.83) 15.37,-43.731 14.973,-43.731 cw(c14.973,-43.632) 14.874,-43.632 14.874,-42.386 ccw(c14.775,-42.386) 14.845,-42.316 14.38,-41.851 ccw(c14.31,-41.921) 14.24,-41.851 ccw(c14.31,-41.921) 14.24,-41.991 14.647,-42.398 cw(c14.577,-42.468) 14.676,-42.468 14.676,-43.83 ccw(c14.775,-43.83) 14.775,-43.929 15.172,-43.929 cw(c15.172,-44.028) 15.271,-44.028 15.271,-44.073 15.271,-44.433 15.546,-44.708 15.572,-44.734 15.572,-45.548 15.815,-45.79 31.536,-45.79 32.143,-45.183 32.143,-45.11 32.077,-45.045 32.048,-45.045 32.092,-45.001 32.092,-44.949 32.068,-44.949 32.068,-44.711 32.878,-44.711 32.878,-44.472 32.49,-44.472 32.49,-44.234 33.354,-44.234 33.354,-43.996 32.966,-43.996 32.966,-43.758 33.831,-43.758 33.831,-43.519 33.443,-43.519 33.443,-43.281 34.307,-43.281 34.307,-43.043 33.919,-43.043 33.919,-42.804 34.774,-42.804 34.774,-42.566 34.526,-42.566 34.526,-42.328 34.765,-42.328 34.986,-42.106 35.103,-41.989 ; 35.104,-41.989 35.111,-41.981 35.111,-36.004 35.337,-35.778 35.337,-35.661 35.553,-35.445 35.67,-35.445 36.194,-34.921 v1(36.57,-34.921)
  L10(SIG) w0.103: R112.1@11.687,-25.204 12.482,-25.204 12.838,-25.56 16.523,-25.56 16.585,-25.623 16.794,-25.623 16.856,-25.56 17.45,-25.56 17.86,-25.15 19.531,-25.15 20.354,-24.327 20.508,-24.327 v1(20.574,-24.261)
DDR_A3: R113.1 U7.K3 U14.N2 U15.N2 | length 113.3
  L1(SIG) w0.103: v1(9.69,-39.398) 13.614,-39.398 13.899,-39.114 16.72,-39.114 U15.N2@17.133,-38.701 ; v1(16.479,-22.447) 16.479,-22.443 16.879,-22.043 U14.N2@16.879,-22.039 ; v1(29.259,-33.639) 26.685,-33.639 26.416,-33.37 26.416,-32.897 26.78,-32.533 26.907,-32.533 27.263,-32.533 cw(c27.263,-32.685) 27.414,-32.685 27.414,-32.763 ccw(c27.566,-32.763) 27.566,-32.915 ccw(c27.566,-32.763) 27.718,-32.763 27.718,-32.524 cw(c27.869,-32.524) 27.869,-32.372 cw(c27.869,-32.524) 28.021,-32.524 28.021,-32.646 ccw(c28.173,-32.646) 28.173,-32.798 ccw(c28.173,-32.646) 28.324,-32.646 28.324,-32.533 cw(c28.476,-32.533) 28.476,-32.381 cw(c28.476,-32.533) 28.628,-32.533 28.628,-32.685 ccw(c28.78,-32.685) 28.78,-32.836 ccw(c28.78,-32.685) 28.931,-32.685 cw(c29.083,-32.685) 29.083,-32.533 30.331,-32.533 35.793,-32.533 U7.K3@36.17,-32.91
  L6(SIG) w0.088: v1(9.69,-39.398) 9.817,-39.271 9.817,-38.485 9.817,-38.441 ccw(c9.673,-38.441) 9.673,-38.297 cw(c9.673,-38.153) 9.529,-38.153 9.529,-35.044 cw(c9.673,-35.044) 9.571,-34.942 11.086,-33.428 cw(c11.188,-33.53) 11.289,-33.428 cw(c11.188,-33.53) 11.289,-33.631 9.859,-35.061 ccw(c9.961,-35.163) 9.817,-35.163 9.817,-37.866 ccw(c9.961,-37.866) 9.961,-38.009 ccw(c9.961,-37.866) 10.105,-37.866 10.105,-35.282 cw(c10.248,-35.282) 10.147,-35.181 11.493,-33.834 cw(c11.594,-33.936) 11.696,-33.835 cw(c11.594,-33.936) 11.696,-34.038 10.434,-35.3 ccw(c10.536,-35.401) 10.392,-35.401 10.392,-37.81 ccw(c10.536,-37.81) 10.536,-37.954 ccw(c10.536,-37.81) 10.68,-37.81 10.68,-35.52 cw(c10.824,-35.52) 10.722,-35.419 11.899,-34.241 cw(c12.001,-34.343) 12.103,-34.242 cw(c12.001,-34.343) 12.103,-34.445 11.009,-35.538 ccw(c11.111,-35.64) 10.967,-35.64 10.967,-36.445 ccw(c11.111,-36.445) 11.111,-36.588 ccw(c11.111,-36.445) 11.255,-36.445 11.255,-35.759 cw(c11.399,-35.759) 11.297,-35.657 12.509,-34.445 ccw(c12.408,-34.343) 12.51,-34.241 11.696,-33.428 cw(c11.798,-33.326) 11.694,-33.226 cw(c11.798,-33.326) 11.695,-33.225 11.727,-33.194 13.187,-31.733 13.187,-31.562 15.41,-29.34 16.28,-29.34 17.331,-28.289 17.331,-28.254 17.985,-27.6 17.985,-24.864 17.96,-24.839 17.958,-24.837 16.506,-23.524 16.479,-23.496 v1(16.479,-22.447)
  L8(SIG) w0.088: v1(9.69,-39.398) 9.69,-38.574 9.792,-38.471 10.436,-38.471 10.467,-38.44 ccw(c10.365,-38.338) 10.467,-38.236 10.465,-38.235 cw(c10.567,-38.133) 10.465,-38.031 cw(c10.567,-38.133) 10.669,-38.031 10.925,-38.287 ccw(c11.027,-38.185) 11.128,-38.287 ccw(c11.027,-38.185) 11.128,-38.083 10.873,-37.827 cw(c10.975,-37.725) 10.873,-37.624 cw(c10.975,-37.725) 11.077,-37.624 11.332,-37.879 ccw(c11.434,-37.777) 11.536,-37.879 ccw(c11.434,-37.777) 11.536,-37.675 11.281,-37.42 cw(c11.383,-37.318) 11.281,-37.216 cw(c11.383,-37.318) 11.485,-37.216 11.74,-37.471 ccw(c11.842,-37.369) 11.944,-37.471 ccw(c11.842,-37.369) 11.944,-37.267 11.942,-37.266 cw(c12.044,-37.164) 12.048,-37.02 12.225,-37.024 12.289,-37.026 13.252,-37.051 13.495,-37.051 13.839,-36.707 14.859,-36.707 17.477,-34.089 20.057,-34.089 20.101,-34.089 ccw(c20.101,-34.004) 20.186,-34.004 20.186,-33.836 cw(c20.27,-33.836) 20.27,-33.752 20.943,-33.752 cw(c20.943,-33.836) 21.027,-33.836 cw(c20.943,-33.836) 20.943,-33.92 20.69,-33.92 ccw(c20.69,-34.004) 20.606,-34.004 ccw(c20.69,-34.004) 20.69,-34.089 23.495,-34.089 25.55,-34.089 27.058,-35.596 27.058,-39.761 27.559,-40.263 28.625,-40.263 29.259,-39.628 29.259,-38.734 29.255,-38.729 29.255,-38.423 29.259,-38.418 v1(29.259,-33.639)
  L10(SIG) w0.103: R113.1@14.351,-19.837 14.38,-19.837 14.453,-19.91 14.453,-20.178 16.435,-22.16 16.435,-22.403 v1(16.479,-22.447)
DDR_A4: R114.1 U7.M4 U14.P8 U15.P8 | length 110.8
  L1(SIG) w0.103: v1(14.384,-45.268) 14.346,-45.23 14.346,-44.14 14.586,-43.901 14.88,-43.901 15.12,-43.661 15.12,-43.367 15.373,-43.114 15.946,-43.114 U15.P8@16.333,-43.501 ; U14.P8@16.079,-26.839 15.692,-27.225 15.692,-28.055 15.673,-28.074 15.673,-28.387 15.692,-28.406 15.692,-28.421 15.692,-29.085 ccw(c15.844,-29.085) 15.951,-29.192 16.025,-29.118 cw(c16.132,-29.225) 16.24,-29.118 cw(c16.132,-29.225) 16.24,-29.333 15.833,-29.739 ccw(c15.94,-29.847) 15.833,-29.954 ccw(c15.94,-29.847) 16.048,-29.954 16.102,-29.9 cw(c16.209,-30.007) 16.316,-29.9 16.353,-29.936 16.518,-30.102 16.518,-30.619 v1(17.272,-31.373) ; U7.M4@36.981,-34.51 36.981,-34.487 37.37,-34.098 v1(37.37,-34.087)
  L6(SIG) w0.088: v1(14.384,-45.268) 15.038,-45.268 15.653,-45.883 15.684,-45.914 ccw(c15.743,-45.854) 15.802,-45.914 15.921,-45.795 cw(c15.98,-45.854) 16.039,-45.795 16.232,-45.988 cw(c16.172,-46.047) 16.256,-46.047 16.256,-46.19 ccw(c16.34,-46.19) 16.34,-46.273 16.675,-46.273 ccw(c16.675,-46.19) 16.759,-46.19 16.759,-45.838 ccw(c16.675,-45.838) 16.735,-45.779 16.647,-45.692 cw(c16.707,-45.633) 16.648,-45.574 cw(c16.707,-45.633) 16.767,-45.574 16.902,-45.709 cw(c16.843,-45.769) 16.927,-45.769 16.927,-45.854 ccw(c17.01,-45.854) 17.01,-45.938 ccw(c17.01,-45.854) 17.094,-45.854 17.094,-45.699 ccw(c17.01,-45.699) 17.07,-45.64 16.788,-45.358 cw(c16.847,-45.299) 16.788,-45.24 cw(c16.847,-45.299) 16.906,-45.24 17.237,-45.571 cw(c17.178,-45.63) 17.262,-45.63 17.262,-46.99 cw(c17.178,-46.99) 17.178,-47.073 cw(c17.178,-46.99) 17.094,-46.99 17.094,-46.19 ccw(c17.01,-46.19) 17.01,-46.106 ccw(c17.01,-46.19) 16.927,-46.19 16.927,-46.99 cw(c16.843,-46.99) 16.843,-47.073 cw(c16.843,-46.99) 16.759,-46.99 16.759,-46.525 ccw(c16.675,-46.525) 16.675,-46.441 ccw(c16.675,-46.525) 16.591,-46.525 16.591,-46.99 cw(c16.508,-46.99) 16.508,-47.073 cw(c16.508,-46.99) 16.424,-46.99 16.424,-46.525 ccw(c16.34,-46.525) 16.34,-46.441 ccw(c16.34,-46.525) 16.256,-46.525 16.256,-46.99 cw(c16.172,-46.99) 16.172,-47.073 cw(c16.172,-46.99) 16.089,-46.99 16.089,-46.116 ccw(c16.005,-46.116) 16.064,-46.057 16.039,-46.032 ccw(c15.98,-46.091) 15.921,-46.032 ccw(c15.98,-46.091) 15.902,-46.122 15.915,-46.155 cw(c15.837,-46.185) 15.921,-46.185 15.921,-47.073 15.921,-47.117 15.921,-47.202 15.494,-47.629 14.224,-47.629 11.43,-44.835 11.43,-41.66 11.303,-41.533 11.303,-39.877 12.255,-38.925 12.255,-38.521 13.439,-37.337 14.562,-37.337 15.413,-36.486 15.413,-35.841 16.352,-34.902 16.384,-34.87 ccw(c16.281,-34.769) 16.385,-34.869 ccw(c16.282,-34.769) 16.383,-34.668 16.18,-34.464 cw(c16.282,-34.363) 16.18,-34.261 16.449,-33.992 cw(c16.551,-34.093) 16.653,-33.992 cw(c16.551,-34.093) 16.653,-34.195 16.586,-34.261 ccw(c16.688,-34.363) 16.688,-34.506 ccw(c16.688,-34.363) 16.79,-34.464 17.23,-34.024 ccw(c17.128,-33.923) 17.272,-33.923 17.272,-33.475 17.272,-33.431 v1(17.272,-31.373)
  L8(SIG) w0.088: v1(14.384,-45.268) 14.384,-44.503 14.56,-44.327 14.747,-44.327 14.986,-44.565 14.986,-45.1 14.986,-45.563 15.528,-46.105 17.065,-46.105 17.09,-46.079 23.749,-46.079 23.901,-46.232 26.162,-46.232 26.206,-46.232 ccw(c26.206,-46.147) 26.29,-46.147 cw(c26.374,-46.147) 26.374,-46.063 29.083,-46.063 cw(c29.083,-46.147) 29.167,-46.147 cw(c29.083,-46.147) 29.083,-46.232 26.543,-46.232 ccw(c26.543,-46.316) 26.459,-46.316 ccw(c26.543,-46.316) 26.543,-46.4 29.252,-46.4 ccw(c29.252,-46.316) 29.336,-46.316 cw(c29.42,-46.316) 29.42,-46.232 29.464,-46.232 31.623,-46.232 35.601,-42.254 35.601,-42.181 35.56,-42.14 35.56,-39.88 35.542,-39.862 35.542,-36.239 35.597,-36.183 35.859,-36.183 36.075,-35.967 36.075,-35.705 36.335,-35.446 36.474,-35.446 36.532,-35.388 36.625,-35.388 36.994,-35.018 36.994,-34.763 37.21,-34.548 39.184,-34.548 39.311,-34.675 39.311,-34.928 40.889,-36.506 40.889,-38.613 41.142,-38.866 41.396,-38.866 41.656,-38.606 41.656,-36.428 39.133,-33.905 38.6,-33.905 38.205,-34.3 37.662,-34.3 37.449,-34.087 v1(37.37,-34.087)
  L10(SIG) w0.103: R114.1@11.687,-31.932 15.062,-31.932 15.367,-31.627 17.018,-31.627 v1(17.272,-31.373)
DDR_A5: R115.1 U7.L1 U14.P2 U15.P2 | length 112.8
  L1(SIG) w0.103: U14.P2@16.079,-22.039 15.692,-22.425 15.692,-23.351 15.692,-23.403 ccw(c15.784,-23.403) 15.784,-23.494 15.808,-23.494 cw(c15.807,-23.586) 15.873,-23.522 15.879,-23.529 cw(c15.813,-23.592) 15.878,-23.657 15.618,-23.917 ccw(c15.683,-23.981) 15.618,-24.046 16.344,-24.772 ccw(c16.409,-24.707) 16.474,-24.772 ccw(c16.409,-24.707) 16.474,-24.642 15.878,-24.046 cw(c15.943,-23.981) 15.878,-23.916 cw(c15.943,-23.981) 16.008,-23.916 16.702,-24.611 ccw(c16.767,-24.546) 16.767,-24.637 16.844,-24.637 16.85,-24.631 17.235,-24.631 17.241,-24.637 17.292,-24.637 cw(c17.292,-24.729) 17.384,-24.729 ccw(c17.476,-24.729) 17.476,-24.821 17.539,-24.821 cw(c17.539,-24.912) 17.604,-24.847 17.931,-25.175 ccw(c17.996,-25.11) 17.996,-25.202 19.272,-25.202 ccw(c19.272,-25.11) 19.364,-25.11 ccw(c19.272,-25.11) 19.272,-25.018 18.072,-25.018 cw(c18.072,-24.927) 18.007,-24.992 17.73,-24.714 cw(c17.795,-24.649) 17.73,-24.584 cw(c17.795,-24.649) 17.859,-24.584 18.083,-24.808 ccw(c18.148,-24.743) 18.148,-24.835 19.456,-24.835 cw(c19.456,-24.927) 19.547,-24.927 ccw(c19.639,-24.927) 19.639,-25.018 19.691,-25.018 19.812,-25.018 19.945,-24.885 20.633,-24.885 20.854,-24.664 v1(20.948,-24.664) ; U15.P2@16.333,-38.701 16.337,-38.701 16.737,-38.301 v1(16.741,-38.301) ; v1(30.607,-33.913) 30.963,-34.269 32.828,-34.269 32.963,-34.134 33.393,-34.134 33.553,-33.975 34.305,-33.975 U7.L1@34.57,-33.71
  L6(SIG) w0.088: v1(16.741,-38.301) 16.755,-38.301 17.189,-37.866 17.818,-37.866 21.183,-34.501 21.183,-34.429 21.178,-33.278 21.178,-33.234 cw(c21.262,-33.234) 21.262,-33.15 21.597,-33.148 ccw(c21.596,-33.065) 21.68,-33.065 21.671,-30.903 ccw(c21.587,-30.903) 21.587,-30.819 ccw(c21.587,-30.903) 21.503,-30.903 21.512,-32.898 cw(c21.428,-32.898) 21.428,-32.982 cw(c21.428,-32.898) 21.344,-32.899 21.328,-29.085 ccw(c21.244,-29.086) 21.244,-29.002 ccw(c21.244,-29.086) 21.161,-29.086 21.177,-32.899 cw(c21.093,-32.899) 21.093,-32.983 cw(c21.093,-32.899) 21.009,-32.9 20.992,-28.919 cw(c21.076,-28.919) 21.076,-28.835 ccw(c21.075,-28.751) 21.159,-28.751 21.159,-28.707 21.311,-28.555 21.311,-27.434 21.035,-27.159 21.035,-26.038 21.165,-25.908 21.165,-25.487 20.997,-25.318 20.997,-24.713 v1(20.948,-24.664)
  L8(SIG) w0.088: v1(16.741,-38.301) 17.117,-37.924 17.252,-37.924 17.559,-37.617 17.559,-37.456 17.549,-37.446 17.612,-37.383 17.643,-37.351 ccw(c17.573,-37.281) 17.644,-37.212 16.802,-36.37 cw(c16.872,-36.3) 16.802,-36.23 17.979,-35.052 cw(c18.05,-35.122) 18.12,-35.052 cw(c18.05,-35.122) 18.12,-35.193 17.082,-36.23 ccw(c17.152,-36.3) 17.053,-36.3 ccw(c17.152,-36.3) 17.222,-36.37 18.871,-34.721 cw(c18.941,-34.792) 19.011,-34.721 cw(c18.941,-34.792) 19.011,-34.862 17.362,-36.511 ccw(c17.433,-36.58) 17.502,-36.651 19.292,-34.862 cw(c19.362,-34.932) 19.432,-34.862 cw(c19.362,-34.932) 19.432,-35.002 17.643,-36.791 ccw(c17.713,-36.861) 17.713,-36.96 ccw(c17.713,-36.861) 17.783,-36.931 19.432,-35.282 cw(c19.502,-35.352) 19.573,-35.422 18.063,-36.931 ccw(c18.134,-37.001) 18.203,-37.072 19.713,-35.562 cw(c19.782,-35.633) 19.882,-35.633 cw(c19.782,-35.633) 19.853,-35.703 18.344,-37.212 ccw(c18.414,-37.281) 18.414,-37.381 ccw(c18.414,-37.281) 18.484,-37.352 20.133,-35.703 ccw(c20.063,-35.633) 20.133,-35.563 19.852,-35.282 cw(c19.923,-35.212) 19.853,-35.142 19.884,-35.111 20.05,-34.945 24.951,-34.945 26.167,-36.161 26.167,-37.973 26.03,-38.111 26.03,-40.39 27.426,-41.787 29.21,-41.787 30.835,-40.162 30.835,-38.053 30.881,-38.008 30.881,-37.806 30.822,-37.747 30.822,-37.233 30.85,-37.205 30.85,-36.428 30.822,-36.4 30.822,-34.226 30.607,-34.01 v1(30.607,-33.913)
  L10(SIG) w0.103: R115.1@11.705,-26.166 12.722,-26.166 12.884,-26.004 19.461,-26.004 20.735,-24.73 20.882,-24.73 v1(20.948,-24.664)